# Altium PCB Temp.PcbDoc
Units mil, origin at the board's own origin, x right, y up, seen from the top; angles counter-clockwise.
Board outline 6000 x 4000 mil, 2 copper layers (Top Layer, Bottom Layer); 10 components, 0 nets, 24 pads, 4 vias.
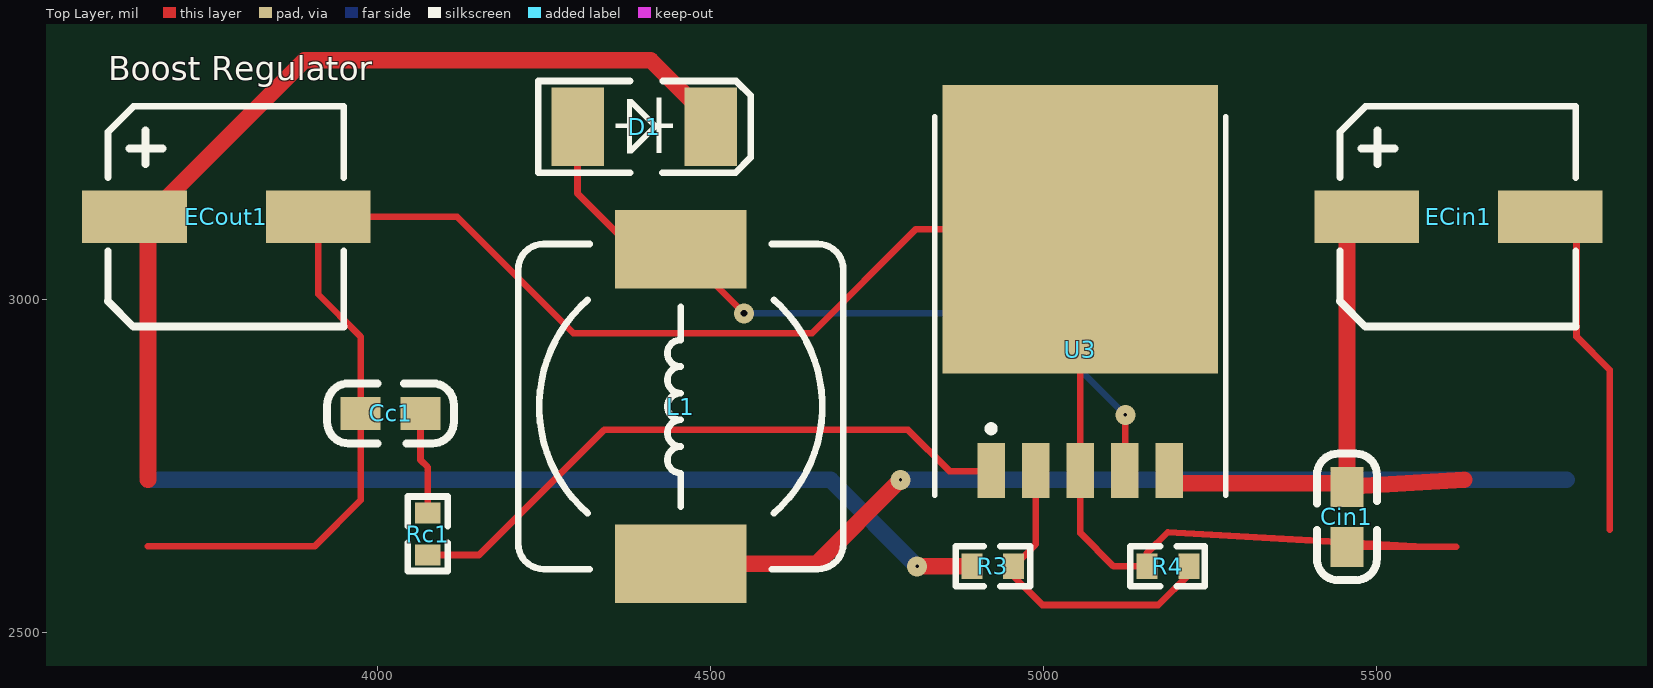
[diagram p0: Top Layer view]
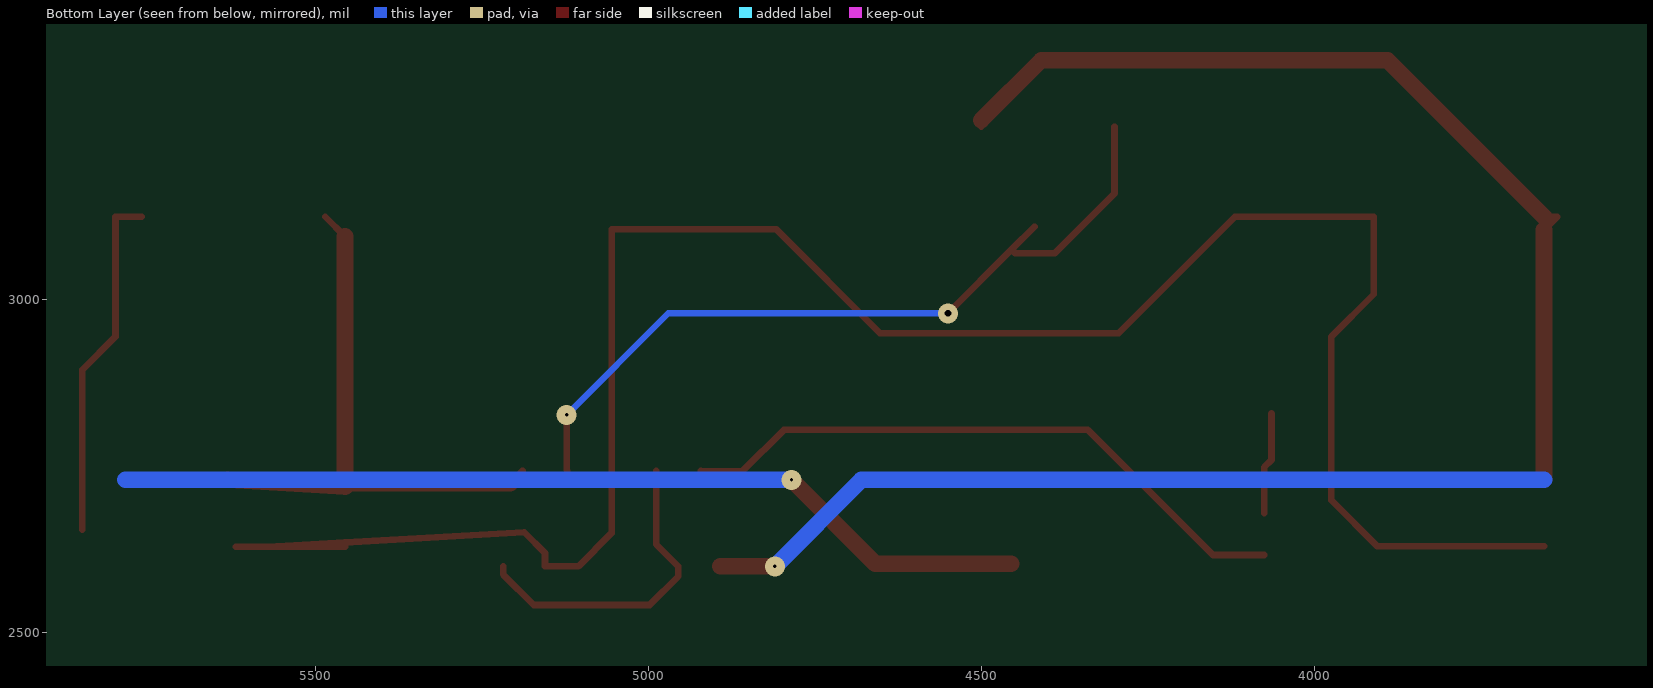
[diagram p1: Bottom Layer view, seen from below]

## Layer stack, top to bottom
Top Solder: solder mask 0.4, Solder Resist, Dk 3.5
Top Layer: signal copper 1.4
Dielectric 1: dielectric 12.6, FR-4, Dk 4.8
Bottom Layer: signal copper 1.4
Bottom Solder: solder mask 0.4, Solder Resist, Dk 3.5

## Board outline
1000,1000 7000,1000 7000,5000 1000,5000

## Design rules (kind name [scope] priority, off if disabled: settings)
Clearance [All] p1: gap=10
PolygonConnect [All] p1: connectstyle=Relief reliefconductorwidth=10 reliefentries=4 polygonreliefangle="90 Angle" airgapwidth=10
RoutingVias [All] p1: holewidth=28 width=50 viastyle="Through Hole" minholewidth=28 minwidth=50 maxholewidth=28 maxwidth=50
SolderMaskExpansion [All] p1: expansion=4
Width [All] p1: maxlimit=10 minlimit=10 preferedwidth=10
30 further rules are at their usual default settings.

## Components (designator, comment, footprint, x,y, rotation, side; value= is the part's Value field where it differs from the comment)
Cc1 "CAP0.47uF" 0805C 3975,2830 r0 top
Cin1 "CAP 0.1uF" 0805C 5455,2630 r90 top
D1 "DIODE SCHOTTKY 1N5820" SMA/DO-214AC 4305,3260 r0 top
ECin1 "SMD_ECAP  100uF   25V" SMD-EC8X8X10 5755,3130 r0 top
ECout1 "SMD_ECAP  680uF    16V" SMD-EC8X8X10 3905,3130 r0 top
L1 "INDUCTOR  15uH Renco RL-54725D" CDRH127 4455,2840 r90 top
R3 "RES 48.7k" 0603R 4955,2600 r180 top
R4 "RES  5.62k" 0603R 5155,2600 r0 top
Rc1 "RES 2k" 0603R 4075,2680 r270 top
U3 "LM2587S-ADJ" TO-263-5 5055,2910 r0 top

## Footprints (in the part's own frame and the unit in brackets; to place one, negate y for a bottom-side part, rotate by r counter-clockwise, add the part's x,y. Pads: shape width x height; smd on the part's side, far side on the other; paste and mask are expansions set on the pad)
0603R [mm]
  rect 0.8x0.965 smd: 1(0,0) 2(1.6,0)
  silkscreen extent -0.64,-0.76 2.21,0.76, body extent -0.04,-0.41 1.56,0.41, height 0.45
0805C [mil]
  rect 60x50 smd: 1(-0.71,-0.4) 2(89.29,-0.4)
  silkscreen extent -51,-45 139,45, body extent 6,-25 84,25, height 31
CDRH127 [mm] "12*12*8mm（长宽高）"
  rect 3x5 smd: 1(-6,0) 2(6,0)
  silkscreen extent -6.2,-6.2 6.2,6.2, body extent -5.87,-6.03 6.13,5.97, height 7.8
SMA/DO-214AC [mm] "塑封二极管"
  rect 2x3 smd: A(-0.127,0) K(4.953,0)
  silkscreen extent -1.63,-1.75 6.48,1.75, body extent 0.11,-1.35 4.71,1.35, height 2.4
SMD-EC8X8X10 [mm]
  rect 4x2 smd: 1(-6.858,-0.127) 2(0.142,-0.127)
  silkscreen extent -7.88,-4.32 1.12,4.08, body extent -8.38,-4.28 1.52,4.02, height 10.2
TO-263-5 [mm] "贴片LM2596"
  rect 1.05x2.1 smd: 1(-3.4,-4.225) 2(-1.7,-4.225) 3(0,-4.225) 4(1.7,-4.225) 5(3.4,-4.225)
  rect 10.5x11 smd: 6(0,4.987)
  silkscreen extent -5.55,-5.17 5.55,9.28, body extent -5.33,-4.7 5.33,10.29, height 3

## Part data
Cc1 Cin1: library part CAP, "无极性电容"
D1: library part "DIODE SCHOTTKY", "肖特基二极管"
ECin1 ECout1: library part SMD_ECAP, "贴片电解电容"
L1: library part INDUCTOR, "INDUCTOR"
R3 R4 Rc1: library part RES
U3: library part LM2577S-ADJ, "DC升压"

## Via types
v1: diameter 30, hole 5, Top Layer to Bottom Layer, 3 vias
v2: diameter 30, hole 10, Top Layer to Bottom Layer, 1 vias

## Nets (pads, with @x,y where several pads share a name; then routed paths per layer and width w, separated by ;. In a path a pad name is that pad's centre, name@x,y a point inside that pad or via, vN(x,y) a via of type N, cw(c..) or ccw(c..) an arc to the next point about the centre after c; other vN are vias at no path point)
pads on no net: Cc1.1 Cc1.2 Cin1.1 Cin1.2 D1.A D1.K ECin1.1 ECin1.2 ECout1.1 ECout1.2 L1.1 L1.2 R3.1 R3.2 R4.1 R4.2 Rc1.1 Rc1.2 U3.1 U3.2 U3.3 U3.4 U3.5 U3.6
copper on no net: | length 11532.9
  Top Layer w10: 3655,2630 3905,2630 3974.29,2699.29 3974.29,2829.6 3974.29,2945 3910.59,3008.7 3910.59,3125 4119,3125 4294,2950 4652,2950 4808.34,3106.34 5055,3106.34 5055,2743.66 5055,2650 5105,2600 5155,2600 5155,2620 5186.22,2651.22 5455.77,2635.81 5557.5,2630 ; 3655,3105 3635,3125 3655,3125 ; 4064.29,2829.6 4064.29,2759.71 4075,2749 4075,2680 ; 4075,2617.01 4152.01,2617.01 4340,2805 4796.29,2805 4858.29,2743 4921.14,2743 4921.14,2743.66 ; 4300,3260 4300,3160 4390,3070 4448.78,3070 4454.39,3075.61 ; 4420,3110 4454.39,3075.61 ; 4455,3076.22 4454.39,3075.61 ; 4500,3260 4500,3270 ; v2(4550,2980) 4454.39,3075.61 ; 4988.07,2743.66 4988.07,2633.07 4955,2600 4955,2585 4997.99,2542.01 5172.01,2542.01 5217.99,2587.99 5217.99,2600 ; 5121.93,2743.66 5122.5,2744.23 v1(5122.5,2827.5) ; 5188.86,2743.66 5207.52,2725 ; 5455.4,2629.29 5619,2629.29 ; 5455.4,3095.4 5485,3125 ; 5760.59,3125 5800,3125 5800,2945 5850,2895 5850,2655
  Top Layer w25: 3655,2730 3655,3105 ; 3655,3125 3890,3360 4410,3360 4500,3270 ; 4455,2603.78 4658.78,2603.78 v1(4785,2730) ; v1(4810,2600) 4892.01,2600 ; 5207.52,2725 5449.69,2725 5455.4,2719.29 ; 5455.4,3095.4 5455.4,2719.29 ; 5631.71,2730 5455.4,2719.29
  Bottom Layer w10: v2(4550,2980) 4970,2980 v1(5122.5,2827.5)
  Bottom Layer w25: 3655,2730 4680,2730 v1(4810,2600) ; v1(4785,2730) 5785,2730

## Silkscreen, mask and mechanical layers (free items; w line width, h text height)
Top Overlay:
  text "Boost Regulator" at 3595,3330 h36